# Altium PCB MACH IN.PcbDoc
Units mm, origin at the board's own origin, x right, y up, seen from the top; angles counter-clockwise.
Board outline 247.01 x 94.11 mm, 2 copper layers (Top Layer, Bottom Layer); 103 components, 99 nets, 299 pads, 0 vias.
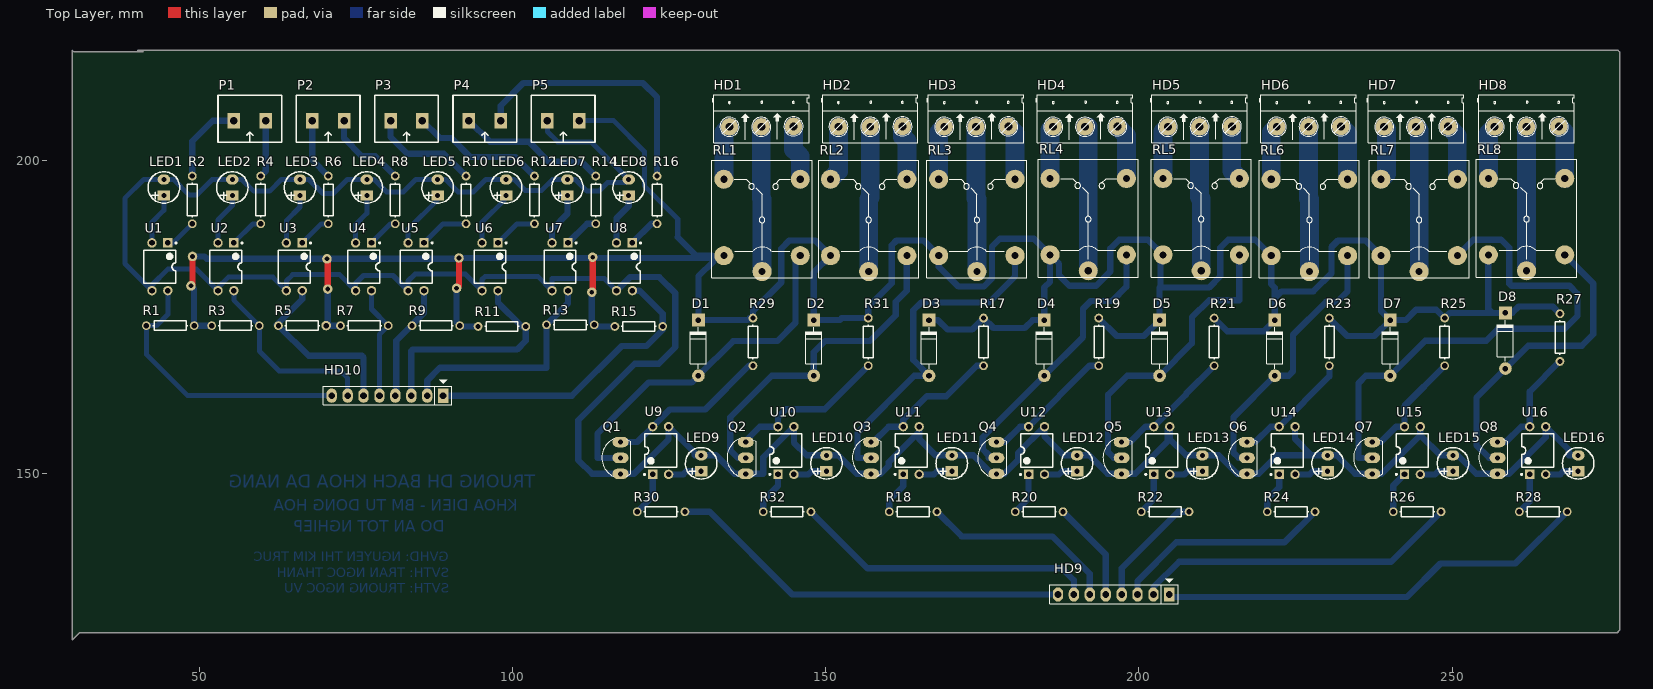
[diagram p0: Top Layer view]
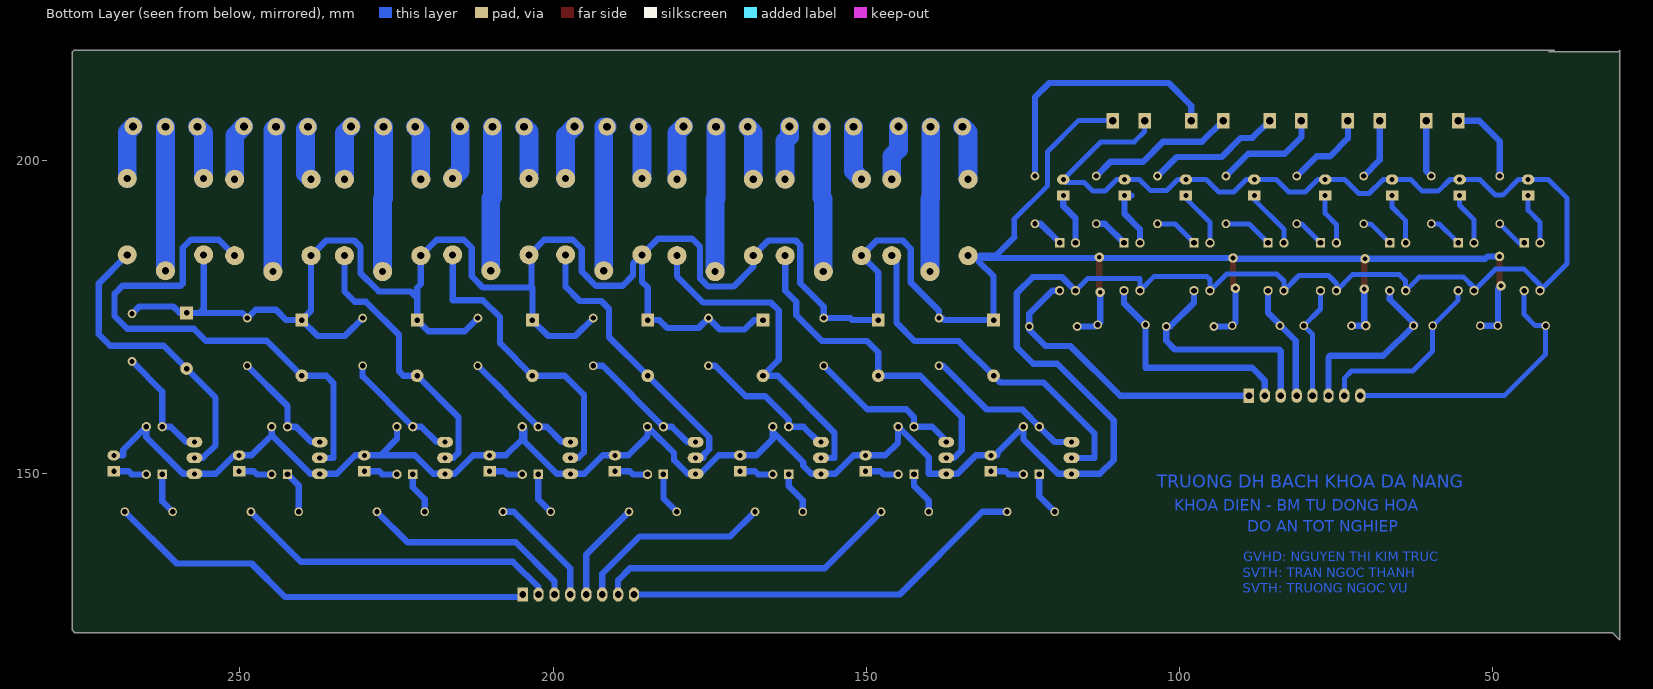
[diagram p1: Bottom Layer view, seen from below]

## Layer stack, top to bottom
Top Layer: signal copper 0.0356
Dielectric: core 0.32, FR-4, Dk 4.8
Bottom Layer: signal copper 0.0356

## Board outline
40.132,217.551 276.479,217.551 276.733,217.297 276.733,124.968 276.352,124.587 30.861,124.587 29.718,123.444 29.718,217.551 29.972,217.297 41.021,217.297

## Design rules (kind name [scope] priority, off if disabled: settings)
Clearance [All] p1: gap=0.381
PolygonConnect [All] p1: connectstyle=Relief reliefconductorwidth=0.254 reliefentries=4 polygonreliefangle="90 Angle"
RoutingLayers [All] p1: top layer_v5=FALSE bottom layer_v5=TRUE
RoutingVias [All] p1: holewidth=0.762 width=1.778 viastyle="Through Hole" minholewidth=0.711 minwidth=1.778 maxholewidth=0.762 maxwidth=1.778
SilkscreenOverComponentPads [All] p1: minsilkscreentomaskgap=0.254
SolderMaskExpansion [All] p1: expansion=0.102
Width [(InNet('NC1') OR InNet('NC2') OR InNet('NC3') OR InNet('NC4') OR InNet('NC5') OR InNet('NC6') OR InNet('NC7') OR InNet('NC8') OR InNet('NO1') OR InNet('NO2') OR InNet('NO3') OR InNet('NO4') OR InNet('NO5') OR InNet('NO6') OR InNet('NO7') OR InNet('NO8') OR InNet('CO1') OR InNet('CO2') OR InNet('CO3') OR InNet('CO4') OR InNet('CO5') OR InNet('CO6') OR InNet('CO7') OR InNet('CO8'))] p1: maxlimit=3.5 minlimit=2 preferedwidth=3
Width ALL_NET [All] p2: maxlimit=2 minlimit=0.8 preferedwidth=1.5
Width power [(InNet('5V') OR InNet('12V')OR InNet('GND'))] p3: maxlimit=2.5 minlimit=1 preferedwidth=2
26 further rules are at their usual default settings.

## Components (designator, comment, footprint, x,y, rotation, side; value= is the part's Value field where it differs from the comment)
D1 "1N4007" D1A 129.667,165.608 r270 top
D2 "1N4007" D1A 148.072,165.608 r270 top
D3 "1N4007" D1A 166.477,165.608 r270 top
D4 "1N4007" D1A 184.882,165.608 r270 top
D5 "1N4007" D1A 203.287,165.608 r270 top
D6 "1N4007" D1A 221.692,165.608 r270 top
D7 "1N4007" D1A 240.097,165.608 r270 top
D8 "1N4007" D1A 258.502,166.751 r270 top
HD1 "Header 3" HED3 134.62,205.359 r0 top
HD2 "Header 3" HED3 152.019,205.359 r0 top
HD3 "Header 3" HED3 168.91,205.359 r0 top
HD4 "Header 3" HED3 186.309,205.359 r0 top
HD5 "Header 3" HED3 204.597,205.359 r0 top
HD6 "Header 3" HED3 221.996,205.359 r0 top
HD7 "Header 3" HED3 239.141,205.359 r0 top
HD8 "Header 3" HED3 256.794,205.359 r0 top
HD9 "Header 8" JP8 204.851,130.683 r180 top
HD10 "Header 8" JP8 88.9,162.433 r180 top
LED1 "LED3" LED3mm 44.323,195.671 r90 top
LED2 "LED3" LED3mm 55.251,195.671 r90 top
LED3 "LED3" LED3mm 66.052,195.671 r90 top
LED4 "LED3" LED3mm 76.726,195.671 r90 top
LED5 "LED3" LED3mm 88.036,195.671 r90 top
LED6 "LED3" LED3mm 98.964,195.671 r90 top
LED7 "LED3" LED3mm 108.749,195.671 r90 top
LED8 "LED3" LED3mm 118.534,195.671 r90 top
LED9 "LED3" LED3mm 130.104,151.631 r90 top
LED10 "LED3" LED3mm 150.107,151.631 r90 top
LED11 "LED3" LED3mm 170.111,151.631 r90 top
LED12 "LED3" LED3mm 190.115,151.631 r90 top
LED13 "LED3" LED3mm 210.118,151.631 r90 top
LED14 "LED3" LED3mm 230.122,151.631 r90 top
LED15 "LED3" LED3mm 250.125,151.631 r90 top
LED16 "LED3" LED3mm 270.129,151.631 r90 top
P1 "Header 2 - M" "Medium - Header 2" 58.039,206.324 r180 top
P2 "Header 2 - M" "Medium - Header 2" 70.549,206.324 r180 top
P3 "Header 2 - M" "Medium - Header 2" 83.058,206.324 r180 top
P4 "Header 2 - M" "Medium - Header 2" 95.567,206.324 r180 top
P5 "Header 2 - M" "Medium - Header 2" 108.077,206.324 r180 top
Q1 "C1815" QTO-92 117.221,152.488 r90 top
Q2 "C1815" QTO-92 137.225,152.488 r90 top
Q3 "C1815" QTO-92 157.228,152.488 r90 top
Q4 "C1815" QTO-92 177.232,152.488 r90 top
Q5 "C1815" QTO-92 197.235,152.488 r90 top
Q6 "C1815" QTO-92 217.239,152.488 r90 top
Q7 "C1815" QTO-92 237.242,152.488 r90 top
Q8 "C1815" QTO-92 257.246,152.488 r90 top
R1 "Res1" AXIAL-0.3 45.339,173.609 r0 top
R2 "Res1" AXIAL-0.3 48.852,193.675 r270 top
R3 "Res1" AXIAL-0.3 55.753,173.609 r180 top
R4 "Res1" AXIAL-0.3 59.78,193.675 r270 top
R5 "Res1" AXIAL-0.3 66.421,173.609 r0 top
R6 "Res1" AXIAL-0.3 70.581,193.675 r270 top
R7 "Res1" AXIAL-0.3 76.327,173.609 r180 top
R8 "Res1" AXIAL-0.3 81.255,193.675 r270 top
R9 "Res1" AXIAL-0.3 87.757,173.609 r0 top
R10 "Res1" AXIAL-0.3 92.565,193.675 r270 top
R11 "Res1" AXIAL-0.3 98.298,173.482 r180 top
R12 "Res1" AXIAL-0.3 103.493,193.675 r270 top
R13 "Res1" AXIAL-0.3 109.22,173.736 r0 top
R14 "Res1" AXIAL-0.3 113.278,193.675 r270 top
R15 "Res1" AXIAL-0.3 120.142,173.482 r180 top
R16 "Res1" AXIAL-0.3 123.063,193.675 r270 top
R17 "Res1" AXIAL-0.3 175.183,171.004 r90 top
R18 "Res1" AXIAL-0.3 163.939,143.891 r180 top
R19 "Res1" AXIAL-0.3 193.588,171.004 r90 top
R20 "Res1" AXIAL-0.3 184.059,143.891 r180 top
R21 "Res1" AXIAL-0.3 211.993,171.004 r90 top
R22 "Res1" AXIAL-0.3 204.18,143.891 r180 top
R23 "Res1" AXIAL-0.3 230.398,171.004 r90 top
R24 "Res1" AXIAL-0.3 224.3,143.891 r180 top
R25 "Res1" AXIAL-0.3 248.803,171.004 r90 top
R26 "Res1" AXIAL-0.3 244.421,143.891 r180 top
R27 "Res1" AXIAL-0.3 267.208,171.704 r90 top
R28 "Res1" AXIAL-0.3 264.541,143.891 r180 top
R29 "Res1" AXIAL-0.3 138.373,171.004 r90 top
R30 "Res1" AXIAL-0.3 123.698,143.891 r180 top
R31 "Res1" AXIAL-0.3 156.778,171.004 r90 top
R32 "Res1" AXIAL-0.3 143.818,143.891 r180 top
RL1 "Relay 10A/12V" RL_SPDT_10A 139.827,182.245 r90 top
RL2 "Relay 10A/12V" RL_SPDT_10A 156.845,182.245 r90 top
RL3 "Relay 10A/12V" RL_SPDT_10A 174.117,182.245 r90 top
RL4 "Relay 10A/12V" RL_SPDT_10A 191.897,182.372 r90 top
RL5 "Relay 10A/12V" RL_SPDT_10A 209.931,182.372 r90 top
RL6 "Relay 10A/12V" RL_SPDT_10A 227.203,182.245 r90 top
RL7 "Relay 10A/12V" RL_SPDT_10A 244.729,182.245 r90 top
RL8 "Relay 10A/12V" RL_SPDT_10A 261.874,182.372 r90 top
U1 "Optoisolator1" DIP-4 43.688,183.007 r270 top
U2 "Optoisolator1" DIP-4 54.229,183.007 r270 top
U3 "Optoisolator1" DIP-4 65.151,183.007 r270 top
U4 "Optoisolator1" DIP-4 76.2,183.007 r270 top
U5 "Optoisolator1" DIP-4 84.582,183.007 r270 top
U6 "Optoisolator1" DIP-4 96.393,183.007 r270 top
U7 "Optoisolator1" DIP-4 107.569,183.007 r270 top
U8 "Optoisolator1" DIP-4 117.856,183.007 r270 top
U9 "Optoisolator1" DIP-4 123.634,153.67 r90 top
U10 "Optoisolator1" DIP-4 143.637,153.67 r90 top
U11 "Optoisolator1" DIP-4 163.641,153.67 r90 top
U12 "Optoisolator1" DIP-4 183.644,153.67 r90 top
U13 "Optoisolator1" DIP-4 203.648,153.67 r90 top
U14 "Optoisolator1" DIP-4 223.651,153.67 r90 top
U15 "Optoisolator1" DIP-4 243.655,153.67 r90 top
U16 "Optoisolator1" DIP-4 263.659,153.67 r90 top

## Footprints (in the part's own frame and the unit in brackets; to place one, negate y for a bottom-side part, rotate by r counter-clockwise, add the part's x,y. Pads: shape width x height; smd on the part's side, far side on the other; paste and mask are expansions set on the pad)
AXIAL-0.3 [mm] "Axial Device, Thru-Hole; 2 Leads; 0.3 in Pin Spacing"
  round 1.4 hole 0.85: 1(-3.81,0) 2(3.81,0)
  silkscreen extent -2.77,-0.76 2.77,0.76
D1A [mil] "Diode 1A, W 100mil, L 350mil"
  round 80 hole 35: 1(0,0)
  rect 80x80 hole 35: 2(-350,0)
  silkscreen extent -305,-50 -45,50, body extent -386,-33 34,36, height 84
DIP-4 [mm] "DIP; 4 Leads; Row Spacing 7.62 mm; Pitch 2.54 mm"
  rect 1.5x1.5 hole 0.9: 1(-3.81,1.27)
  round 1.5 hole 0.9: 2(-3.81,-1.27) 3(3.81,-1.27) 4(3.81,1.27)
  silkscreen extent -3.93,-2.55 2.65,2.7, body extent -3.15,-2.5 3.15,2.5, height 5.6
HED3 [mil] "Header 3, 3 pin, hight 300mil, Pin to Pin 200, Colour Green"
  round 110 hole 50: 1(0,0) 2(200,0) 3(402.62,2.62)
  silkscreen extent -106,-100 500,200
JP8 [mil] "JP8"
  rect 65x90 hole 42: 1(0,0)
  oval 65x90 hole 42: 2(100,0) 3(200,0) 4(300,0) 5(400,0) 6(500,0) 7(600,0) 8(700,0)
  silkscreen extent -56,-100 752,57, body extent -48,-50 748,48, height 323
LED3mm [mm]
  rect 1.6x2 hole 0.8: 1(-1.27,0)
  oval 1.6x2 hole 0.8: 2(1.27,0)
  silkscreen extent -2.52,-2.51 2.51,2.52, body extent -1.99,-1.5 1.99,1.99, height 5.38
"Medium - Header 2" [mm]
  rect 2x2.5 hole 1.2: 1(-2.54,0) 2(2.54,0)
  silkscreen extent -5.08,-4.08 5.08,3.43, body extent -5,-4.07 5,3.43, height 10
QTO-92 [mil] "TO-92"
  oval 66x100 hole 32: 1(-100,0) 2(0,0) 3(100,0)
  silkscreen extent -117,-65 120,118, body extent -109,-66 109,95, height 245
RL_SPDT_10A [mil] "Relay SPDT, 5 pin, 10A,W 650mil, L 800mil, H 800mil"
  round 120 hole 45: 1(0,0) 2(580,240) 3(580,-240) 4(100,-240) 5(100,240)
  silkscreen extent -40,-315 700,315

## Part data
D1 D2 D3 D4 D5 D6 D7 D8: library part D1A, "Diode 1A"
HD1 HD2 HD3 HD4 HD5 HD6 HD7 HD8: library part Hed3, "Header 3 (Green)"
HD9 HD10: library part HED8V, "Header 8 Vit Broad"
LED1 LED2 LED3 LED4 LED5 LED6 LED7 LED8 LED9 LED10 LED11 LED12 LED13 LED14 LED15 LED16: library part "LED 3mm", "LED 3mm"
P1 P2 P3 P4 P5: "Header, 2-Pin, Medium"
Q1 Q2 Q3 Q4 Q5 Q6 Q7 Q8: "NPN 600mW, ECB"
R1 R2 R3 R4 R5 R6 R7 R8 R9 R10 R11 R12 R13 R14 R15 R16 R17 R18 R19 R20 R21 R22 R23 R24 R25 R26 R27 R28 R29 R30 R31 R32: "Resistor"
RL1 RL2 RL3 RL4 RL5 RL6 RL7 RL8: library part "Relay 1", "Relay SPDT,10A - 12VDC 5 Pin"
U1 U2 U3 U4 U5 U6 U7 U8 U9 U10 U11 U12 U13 U14 U15 U16: "4-Pin Phototransistor Optocoupler"

## Free pads (board coordinates)
  round 1.524 hole 0.762: 0(48.641,179.959) 1(48.895,184.658) 2(70.358,184.277) 3(70.485,179.451) 4(91.44,184.404) 5(91.059,179.578) 6(112.776,184.531) 7(112.649,178.943) 8(70.231,173.609)

## Nets (pads, with @x,y where several pads share a name; then routed paths per layer and width w, separated by ;. In a path a pad name is that pad's centre, name@x,y a point inside that pad or via, vN(x,y) a via of type N, cw(c..) or ccw(c..) an arc to the next point about the centre after c; other vN are vias at no path point)
5V: 
12V: D1.2 D2.2 D3.2 D4.2 D5.2 D6.2 D7.2 D8.2 P5.1 pad.0 pad.1 pad.2 pad.3 pad.4 pad.5 pad.6 pad.7 pad.8 R1.2 R3.2 R5.2 R7.2 R9.2 R11.2 R13.2 R15.2 R17.2 R19.2 R21.2 R23.2 R25.2 R27.2 R29.2 R31.2 RL1.5 RL2.5 RL3.5 RL4.5 RL5.5 RL6.5 RL7.5 RL8.5 | length 504.4
  Top Layer w1: pad.0 48.895,180.213 pad.1 ; pad.2 70.485,184.15 pad.3 ; pad.5 91.44,179.959 pad.4 ; pad.7 112.776,179.07 pad.6
  Bottom Layer w0.8: P5.1 116.129,206.324 121.031,201.422 121.031,195.961 126.365,190.627 126.365,187.706
  Bottom Layer w1: pad.0 49.149,179.451 R1.2 R3.2 ; pad.1 50.8,184.658 51.181,184.277 pad.2 91.313,184.277 pad.4 133.35,184.404 RL1.5 ; pad.3 70.485,173.863 pad.8 R7.2 ; pad.5 91.059,174.117 91.694,173.482 R11.2 ; pad.7 112.649,174.117 R13.2 113.284,173.482 R15.2 ; 126.365,187.706 129.286,184.785 131.826,184.785 ; 132.08,183.896 129.667,181.483 D1.2 137.516,174.498 137.832,174.814 R29.2 138.373,175.99 142.875,180.492 142.875,185.903 144.17,187.198 148.336,187.198 RL2.5 148.072,182.108 D2.2 152.248,174.498 152.564,174.814 R31.2 156.778,176.632 160.528,180.382 160.528,186.436 161.29,187.198 165.608,187.198 RL3.5 168.021,183.007 171.188,179.84 175.235,179.84 176.522,181.127 176.522,186.199 177.8,187.477 183.236,187.477 RL4.5 ; D3.2 167.919,174.498 169.443,172.974 173.343,172.974 R17.2 176.769,173.228 181.737,173.228 183.007,174.498 D4.2 184.882,179.705 185.801,180.624 RL4.5 ; R19.2 196.444,171.958 200.747,171.958 D5.2 203.287,179.699 ; R21.2 214.087,172.72 219.914,172.72 D6.2 221.692,178.012 ; R23.2 233.254,171.958 237.557,171.958 D7.2 ; RL8.5 255.778,176.276 256.413,175.641 D8.2 ; R27.2 266.065,176.657 260.604,176.657 259.588,175.641 D8.2 ; RL4.5 187.249,183.464 187.249,181.61 188.892,179.967 193.15,179.967 195.433,182.251 195.433,185.908 196.85,187.325 201.422,187.325 RL5.5 203.454,184.531 203.454,179.872 203.287,179.705 203.294,179.699 211.187,179.699 212.979,181.491 212.979,186.063 214.241,187.325 218.567,187.325 RL6.5 221.107,180.239 221.692,179.654 221.692,178.012 ; 221.692,178.012 222.75,179.07 227.83,179.07 230.739,181.979 230.739,186.162 231.775,187.198 236.22,187.198 RL7.5 238.633,175.962 D7.2 ; D7.2 242.57,174.498 244.221,176.149 247.468,176.149 R25.2 249.63,175.641 D8.2
CO1: HD1.2 RL1.1 | length 23.2
  Bottom Layer w3: HD1.2 139.7,193.929 139.827,193.802 RL1.1
CO2: HD2.2 RL2.1 | length 23.2
  Bottom Layer w3: RL2.1 156.845,193.802 157.099,194.056 HD2.2
CO3: HD3.2 RL3.1 | length 23.2
  Bottom Layer w3: HD3.2 173.99,193.929 174.117,193.802 RL3.1
CO4: HD4.2 RL4.1 | length 23.5
  Bottom Layer w3: HD4.2 191.897,205.359 RL4.1
CO5: HD5.2 RL5.1 | length 23.1
  Bottom Layer w3: HD5.2 209.677,194.132 209.931,193.878 RL5.1
CO6: HD6.2 RL6.1 | length 23.2
  Bottom Layer w3: HD6.2 227.076,193.929 227.203,193.802 RL6.1
CO7: HD7.2 RL7.1 | length 23.3
  Bottom Layer w3: HD7.2 244.729,204.851 RL7.1
CO8: HD8.2 RL8.1 | length 23
  Bottom Layer w3: RL8.1 HD8.2
GND: LED1.2 LED2.2 LED3.2 LED4.2 LED5.2 LED6.2 LED7.2 LED8.2 LED9.2 LED10.2 LED11.2 LED12.2 LED13.2 LED14.2 LED15.2 LED16.2 P5.2 Q1.1 Q2.1 Q3.1 Q4.1 Q5.1 Q6.1 Q7.1 Q8.1 U1.3 U2.3 U3.3 U4.3 U5.3 U6.3 U7.3 U8.3 U9.3 U10.3 U11.3 U12.3 U13.3 U14.3 U15.3 U16.3 | length 491.7
  Bottom Layer w0.8: P5.2 105.537,204.597 107.188,202.946 112.528,202.946 LED8.2 118.062,196.469 115.189,196.469 113.792,195.072 111.887,195.072 110.018,196.941 LED7.2 106.39,196.941 104.648,195.199 101.981,195.199 100.239,196.941 LED6.2 95.722,196.941 93.726,194.945 91.313,194.945 89.317,196.941 LED5.2 84.546,196.941 82.55,194.945 79.883,194.945 77.887,196.941 LED4.2 73.624,196.941 71.374,194.691 69.723,194.691 67.473,196.941 LED3.2 63.083,196.941 61.214,195.072 58.674,195.072 56.805,196.941 LED2.2 52.034,196.941 49.53,194.437 48.387,194.437 45.883,196.941 LED1.2 41.112,196.941 38.1,193.929 38.1,183.515 U1.3 42.418,180.086 44.958,182.626 49.53,182.626 U2.3 52.959,179.705 54.61,181.356 61.722,181.356 U3.3 63.881,180.721 64.897,181.737 72.39,181.737 U4.3 74.93,180.34 76.2,181.61 80.899,181.61 U5.3 83.312,180.721 84.455,181.864 92.456,181.864 U6.3 95.123,180.975 95.631,181.483 104.013,181.483 U7.3 106.299,181.102 114.681,181.102 U8.3
  Bottom Layer w1: U8.3 118.745,181.356 123.444,181.356 125.984,178.816 125.984,170.18 123.317,167.513 119.507,167.513 110.49,158.496 110.49,152.146 112.688,149.948 Q1.1 119.38,149.948 124.904,155.472 U9.3 129.095,153.289 129.095,152.901 LED9.2 132.468,152.901 135.421,149.948 Q2.1 140.03,149.948 140.03,152.603 U10.3 144.907,154.94 146.946,152.901 LED10.2 151.994,152.901 154.946,149.948 Q3.1 158.75,149.948 160.045,151.244 160.045,151.79 164.911,156.656 U11.3 164.911,155.503 167.513,152.901 LED11.2 173.533,152.901 176.485,149.948 Q4.1 178.523,149.948 180.67,152.095 180.67,153.236 U12.3 184.914,155.954 187.967,152.901 LED12.2 192.031,152.901 194.984,149.948 Q5.1 199.39,149.948 204.597,155.155 204.597,157.159 U13.3 204.918,155.501 207.518,152.901 LED13.2 212.732,152.901 215.685,149.948 Q6.1 219.138,149.948 222.09,152.901 227.533,152.901 ; U14.3 224.921,155.513 227.533,152.901 ; U15.3 244.925,156.113 ; LED16.2 268.605,152.901 268.605,153.804 U16.3 264.929,155.797 259.08,149.948 Q8.1 253.854,149.948 250.901,152.901 LED15.2 248.137,152.901 244.925,156.113 ; 227.533,152.901 LED14.2 231.554,152.901 234.507,149.948 Q7.1 238.76,149.948 244.925,156.113
IN1: HD10.8 R1.1 U1.4 | length 44.9
  Bottom Layer w0.8: U1.4 44.958,175.387 43.18,173.609 R1.1 41.529,169.037 48.133,162.433 HD10.8
IN2: HD10.7 R3.1 U2.4 | length 30
  Bottom Layer w0.8: U2.4 55.499,177.673 R3.1 59.563,169.545 62.738,166.37 72.517,166.37 73.66,165.227 HD10.7
IN3: HD10.6 R5.1 U3.4 | length 29.2
  Bottom Layer w1: U3.4 66.421,177.8 62.357,173.736 62.484,173.736 R5.1 67.437,168.783 75.946,168.783 76.2,168.529 HD10.6
IN4: HD10.5 R7.1 U4.4 | length 18.4
  Bottom Layer w0.8: U4.4 77.47,176.276 R7.1 78.74,172.212 HD10.5
IN5: HD10.4 R9.1 U5.4 | length 19.5
  Bottom Layer w0.8: HD10.4 HD10.4@81.28,163.322
  Bottom Layer w1: HD10.4 81.418,162.571 81.418,171.207 85.852,175.641 U5.4
IN6: HD10.3 R11.1 U6.4 | length 36.3
  Bottom Layer w1: HD10.3 83.82,169.545 84.074,169.799 100.711,169.799 102.108,171.196 R11.1 101.473,173.482 97.663,177.292 U6.4
IN7: HD10.2 R13.1 U7.4 | length 36
  Bottom Layer w1: HD10.2 86.36,164.846 88.392,166.878 105.41,166.878 R13.1 108.839,177.165 U7.4
IN8: HD10.1 R15.1 U8.4 | length 48.3
  Bottom Layer w1: HD10.1 109.474,162.433 117.38,170.339 121.317,170.339 123.952,172.974 123.952,175.514 120.269,179.197 U8.4
IN11: P1.2 R2.1 | length 13.6
  Bottom Layer w1: R2.1 48.852,203.03 52.146,206.324 P1.2
IN21: P1.1 R4.1 | length 9.2
  Bottom Layer w1: R4.1 60.579,198.284 P1.1
IN31: P2.2 R6.1 | length 9.9
  Bottom Layer w1: P2.2 68.008,200.058 R6.1
IN41: P2.1 R8.1 | length 13.5
  Bottom Layer w1: P2.1 73.088,203.517 75.946,200.66 78.08,200.66 R8.1
IN51: P3.2 R10.1 | length 17.2
  Bottom Layer w1: P3.2 80.518,203.708 83.185,201.041 89.009,201.041 R10.1
IN61: P3.1 R12.1 | length 21.6
  Bottom Layer w1: P3.1 88.341,203.581 90.17,203.581 93.218,200.533 100.445,200.533 R12.1
IN71: P4.2 R14.1 | length 24.2
  Bottom Layer w1: P4.2@93.027,206.058 P4.2 96.406,202.946 102.616,202.946 105.791,199.771 110.992,199.771 R14.1
IN81: P4.1 R16.1 | length 42.4
  Bottom Layer w1: P4.1 98.108,208.724 101.727,212.344 120.777,212.344 123.063,210.058 R16.1
NC1: HD1.1 RL1.2 | length 8.8
  Bottom Layer w3: RL1.2 133.731,204.47 HD1.1
NC2: HD2.1 RL2.2 | length 8.9
  Bottom Layer w3: RL2.2 152.019,198.247 HD2.1
NC3: HD3.1 RL3.2 | length 8.8
  Bottom Layer w3: RL3.2 168.021,204.47 HD3.1
NC4: HD4.1 RL4.2 | length 8.5
  Bottom Layer w3: RL4.2 185.801,204.851 HD4.1
NC5: HD5.1 RL5.2 | length 8.6
  Bottom Layer w3: RL5.2 203.835,204.597 HD5.1
NC6: HD6.1 RL6.2 | length 8.8
  Bottom Layer w3: RL6.2 221.107,204.47 HD6.1
NC7: HD7.1 RL7.2 | length 8.9
  Bottom Layer w3: RL7.2 239.522,197.866 239.522,204.978 HD7.1
NC8: HD8.1 RL8.2 | length 8.7
  Bottom Layer w3: RL8.2 255.778,204.343 HD8.1
NetD1_1: D1.1 Q1.2 RL1.4 | length 57.6
  Bottom Layer w1: Q1.2 113.538,152.488 113.538,156.376 121.677,164.516 128.575,164.516 D1.1 135.204,171.145 142.24,171.145 145.161,174.066 145.161,184.023 RL1.4
NetD2_1: D2.1 Q2.2 RL2.4 | length 53.9
  Bottom Layer w1: Q2.2 135.966,152.488 134.747,153.707 134.747,158.979 141.376,165.608 D2.1 148.072,169.357 149.86,171.145 157.048,171.145 161.163,175.26 161.163,177.419 162.941,179.197 RL2.4
NetD3_1: D3.1 Q3.2 RL3.4 | length 54.7
  Bottom Layer w1: Q3.2 155.067,152.488 155.067,156.54 164.135,165.608 D3.1 163.957,168.128 163.957,176.046 165.203,177.292 175.986,177.292 180.213,181.519 RL3.4
NetD4_1: D4.1 Q4.2 RL4.4 | length 45.6
  Bottom Layer w1: Q4.2 175.971,152.488 175.971,152.959 175.057,153.873 175.057,155.783 D4.1 191.059,171.785 191.059,176.327 192.278,177.546 195.707,177.546 197.993,179.832 RL4.4
NetD5_1: D5.1 Q5.2 RL5.4 | length 48.6
  Bottom Layer w1: Q5.2 195.986,152.488 195.072,153.403 195.072,162.56 198.12,165.608 D5.1 208.458,170.779 208.458,174.93 211.201,177.673 216.027,177.673 RL5.4
NetD6_1: D6.1 Q6.2 RL6.4 | length 43.8
  Bottom Layer w1: Q6.2 215.913,152.488 215.087,153.314 215.087,159.003 D6.1 223.901,165.608 224.594,166.301 224.594,172.143 229.87,177.419 231.648,177.419 233.299,179.07 RL6.4
NetD7_1: D7.1 Q7.2 RL7.4 | length 84.2
  Bottom Layer w1: Q7.2 235.052,152.488 235.052,164.44 236.22,165.608 D7.1 245.685,171.196 255.422,171.196 257.327,173.101 267.97,173.101 270.002,175.133 270.002,178.689 268.732,179.959 259.461,179.959 259.105,180.315 259.105,186.03 257.81,187.325 253.365,187.325 RL7.4
NetD8_1: D8.1 Q8.2 RL8.4 | length 49.3
  Bottom Layer w1: Q8.2 255.905,152.488 253.873,154.52 253.873,162.122 D8.1 262.135,170.383 270.713,170.383 272.542,172.212 272.542,180.34 RL8.4
NetLED1_1: LED1.1 U1.2 | length 8.4
  Bottom Layer w0.8: U1.2 42.418,190.119 44.323,192.024 LED1.1
NetLED2_1: LED2.1 U2.2 | length 8.5
  Bottom Layer w0.8: U2.2 52.959,190.5 55.251,192.792 LED2.1
NetLED3_1: LED3.1 U3.2 | length 8.5
  Bottom Layer w0.8: U3.2 63.881,190.373 66.052,192.544 LED3.1
NetLED4_1: LED4.1 U4.2 | length 8.3
  Bottom Layer w0.8: U4.2 74.93,189.738 76.726,191.534 LED4.1
NetLED5_1: LED5.1 U5.2 | length 9.5
  Bottom Layer w0.8: U5.2 83.312,188.976 88.035,193.699 LED5.1
NetLED6_1: LED6.1 U6.2 | length 9.2
  Bottom Layer w0.8: U6.2 95.123,190.119 98.964,193.96 LED6.1
NetLED7_1: LED7.1 U7.2 | length 9.7
  Bottom Layer w1: U7.2 106.299,188.976 108.749,191.426 LED7.1 107.66,194.401
NetLED8_1: LED8.1 U8.2 | length 8.4
  Bottom Layer w1: U8.2 116.586,190.754 118.534,192.702 LED8.1
NetLED9_1: LED9.1 U9.2 | length 5.4
  Bottom Layer w1: U9.2 127.229,149.86 127.729,150.361 LED9.1
NetLED10_1: LED10.1 U10.2 | length 5.4
  Bottom Layer w1: U10.2 147.244,149.86 147.745,150.361 LED10.1
NetLED11_1: LED11.1 U11.2 | length 5.4
  Bottom Layer w1: U11.2 167.259,149.86 167.76,150.361 LED11.1
NetLED12_1: LED12.1 U12.2 | length 5.4
  Bottom Layer w1: U12.2 187.249,149.86 187.75,150.361 LED12.1
NetLED13_1: LED13.1 U13.2 | length 5.4
  Bottom Layer w1: U13.2 207.264,149.86 207.765,150.361 LED13.1
NetLED14_1: LED14.1 U14.2 | length 5.4
  Bottom Layer w1: U14.2 227.254,149.86 227.755,150.361 LED14.1
NetLED15_1: LED15.1 U15.2 | length 5.4
  Bottom Layer w1: U15.2 247.269,149.86 247.77,150.361 LED15.1
NetLED16_1: LED16.1 U16.2 | length 5.4
  Bottom Layer w1: U16.2 267.259,149.86 267.76,150.361 LED16.1
NetQ1_3: Q1.3 R29.1 U9.4 | length 26.2
  Bottom Layer w1: Q1.3 119.912,155.028 U9.4 125.107,160.223 130.759,160.223 137.73,167.194 R29.1
NetQ2_3: Q2.3 R31.1 U10.4 | length 25.6
  Bottom Layer w1: Q2.3 137.225,155.259 139.446,157.48 U10.4 142.367,159.004 143.612,160.249 149.832,160.249 R31.1
NetQ3_3: Q3.3 R17.1 U11.4 | length 23.6
  Bottom Layer w1: Q3.3 157.568,155.028 160.02,157.48 U11.4 162.371,158.561 166.14,162.33 169.218,162.33 174.082,167.194 R17.1
NetQ4_3: Q4.3 R19.1 U12.4 | length 21.4
  Bottom Layer w1: Q4.3 178.562,155.028 181.014,157.48 U12.4 192.088,167.194 R19.1
NetQ5_3: Q5.3 R21.1 U13.4 | length 19.9
  Bottom Layer w1: Q5.3 198.577,155.028 201.029,157.48 U13.4 207.493,162.595 207.493,162.694 R21.1
NetQ6_3: Q6.3 R23.1 U14.4 | length 19.2
  Bottom Layer w1: Q6.3 218.567,155.028 221.019,157.48 U14.4 230.398,165.496 R23.1
NetQ7_3: Q7.3 R25.1 U15.4 | length 18.5
  Bottom Layer w1: Q7.3 238.582,155.028 241.034,157.48 U15.4 242.385,160.776 R25.1
NetQ8_3: Q8.3 R27.1 U16.4 | length 18.6
  Bottom Layer w1: Q8.3 258.572,155.028 261.024,157.48 U16.4 262.389,163.075 R27.1
NetR2_2: R2.2 U1.1 | length 5.2
  Bottom Layer w0.8: U1.1 45.804,186.817 R2.2
NetR4_2: R4.2 U2.1 | length 5.5
  Bottom Layer w0.8: U2.1 58.547,189.865 R4.2
NetR6_2: R6.2 U3.1 | length 5.4
  Bottom Layer w0.8: U3.1 69.469,189.865 R6.2
NetR8_2: R8.2 U4.1 | length 5
  Bottom Layer w0.8: U4.1 80.518,189.865 R8.2
NetR10_2: R10.2 U5.1 | length 8
  Bottom Layer w0.8: U5.1 88.9,189.865 R10.2
NetR12_2: R12.2 U6.1 | length 7.1
  Bottom Layer w0.8: U6.1 100.711,189.865 R12.2
NetR14_2: R14.2 U7.1 | length 5.7
  Bottom Layer w1: U7.1 111.887,189.865 R14.2
NetR16_2: R16.2 U8.1 | length 5.2
  Bottom Layer w1: U8.1 122.174,189.865 R16.2
NetR18_2: R18.2 U11.1 | length 6.9
  Bottom Layer w1: R18.2 160.129,145.745 162.371,147.987 U11.1
NetR20_2: R20.2 U12.1 | length 6.8
  Bottom Layer w1: R20.2 182.374,146.016 U12.1
NetR22_2: R22.2 U13.1 | length 6.8
  Bottom Layer w1: R22.2 202.378,145.899 U13.1
NetR24_2: R24.2 U14.1 | length 6.8
  Bottom Layer w1: R24.2 220.49,145.923 222.381,147.814 U14.1
NetR26_2: R26.2 U15.1 | length 6.7
  Bottom Layer w1: R26.2 240.611,148.086 U15.1
NetR28_2: R28.2 U16.1 | length 6.7
  Bottom Layer w1: R28.2 262.389,145.549 U16.1
NetR30_2: R30.2 U9.1 | length 7
  Bottom Layer w1: R30.2 122.364,146.367 U9.1
NetR32_2: R32.2 U10.1 | length 6.9
  Bottom Layer w1: R32.2 140.008,145.694 142.367,148.053 U10.1
NO1: HD1.3 RL1.3 | length 8.9
  Bottom Layer w3: HD1.3 144.847,201.736 145.923,200.66 RL1.3
NO2: HD2.3 RL2.3 | length 8.7
  Bottom Layer w3: HD2.3 162.246,203.768 162.941,203.073 RL2.3
NO3: HD3.3 RL3.3 | length 8.9
  Bottom Layer w3: HD3.3 180.213,204.349 RL3.3
NO4: HD4.3 RL4.3 | length 8.9
  Bottom Layer w3: HD4.3 197.993,203.968 RL4.3
NO5: HD5.3 RL5.3 | length 8.8
  Bottom Layer w3: HD5.3 214.824,198.307 RL5.3
NO6: HD6.3 RL6.3 | length 8.9
  Bottom Layer w3: HD6.3 233.299,204.349 RL6.3
NO7: HD7.3 RL7.3 | length 9.1
  Bottom Layer w3: HD7.3 250.825,203.968 RL7.3
NO8: HD8.3 RL8.3 | length 8.7
  Bottom Layer w3: HD8.3 267.97,204.476 RL8.3
OUT1: HD9.8 R30.1 | length 65
  Bottom Layer w1: R30.1 131.445,143.891 144.653,130.683 HD9.8
OUT2: HD9.7 R32.1 | length 48.8
  Bottom Layer w1: R32.1 156.645,134.874 187.706,134.874 189.611,132.969 HD9.7
OUT3: HD9.6 R18.1 | length 31.8
  Bottom Layer w1: R18.1 171.686,139.954 186.182,139.954 192.151,133.985 HD9.6
OUT4: HD9.5 R20.1 | length 16
  Bottom Layer w1: R20.1 194.691,137.069 HD9.5
OUT5: HD9.4 R22.1 | length 18.7
  Bottom Layer w1: HD9.4 197.231,134.874 206.248,143.891 R22.1
OUT6: HD9.3 R24.1 | length 35.1
  Bottom Layer w1: HD9.3 199.771,132.842 205.943,139.014 223.233,139.014 R24.1
OUT7: HD9.2 R26.1 | length 52.1
  Bottom Layer w1: HD9.2 202.311,131.826 206.398,135.913 240.252,135.913 R26.1
OUT8: HD9.1 R28.1 | length 69.3
  Bottom Layer w1: HD9.1 205.232,130.302 242.799,130.302 248.133,135.636 260.096,135.636 R28.1

## Other copper
Bottom Layer:
  text "TRUONG DH BACH KHOA DA NANG" at 103.632,147.701 h2.03
  text "KHOA DIEN - BM TU DONG HOA" at 100.858,144.018 h1.78
  text "DO AN TOT NGHIEP" at 89.154,140.716 h1.78
  text "GVHD: NGUYEN THI KIM TRUC" at 89.789,136.017 h1.52
  text "SVTH: TRAN NGOC THANH" at 89.865,133.477 h1.52
  text "SVTH: TRUONG NGOC VU" at 89.865,130.937 h1.52